# Altium PCB PCB2.PcbDoc
Units mm, origin at the board's own origin, x right, y up, seen from the top; angles counter-clockwise.
Board outline 152.4 x 101.6 mm, 2 copper layers (Top Layer, Bottom Layer); 2 components, 4 nets, 11 pads, 0 vias.
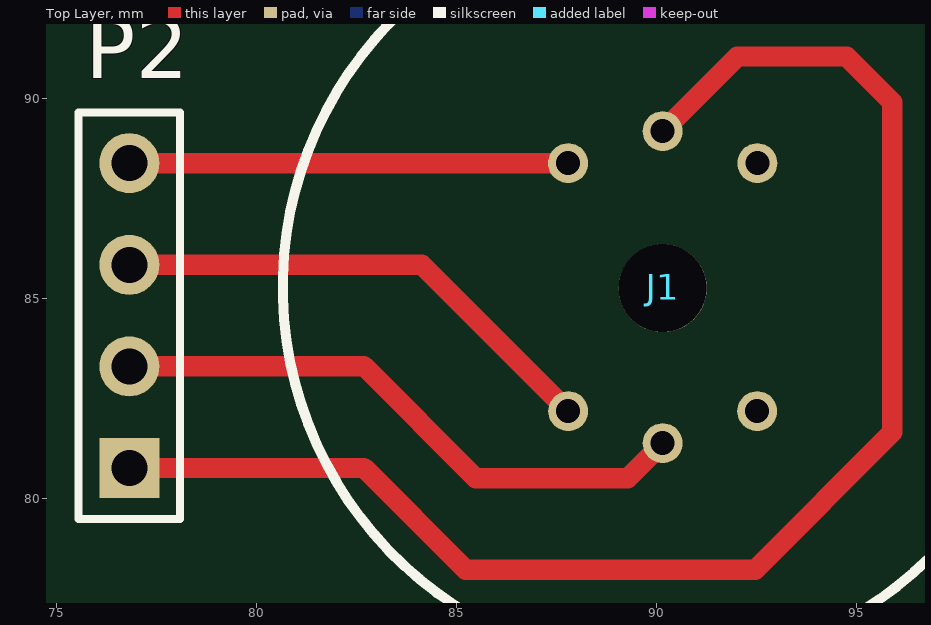
[diagram p0: Top Layer view]
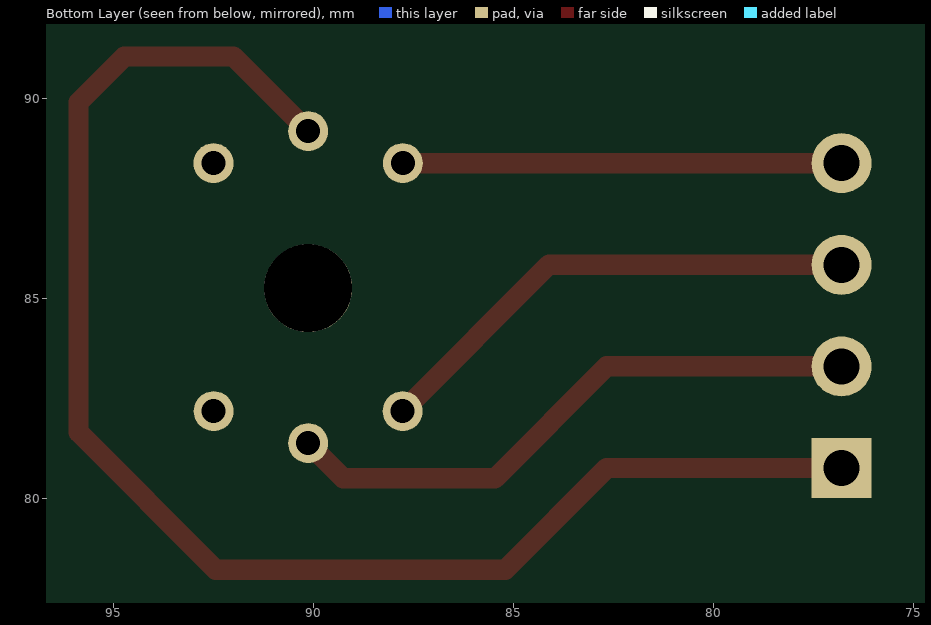
[diagram p1: Bottom Layer view, seen from below]

## Layer stack, top to bottom
Top Layer: signal copper 0.0356
Dielectric: dielectric 0.32, FR-4, Dk 4.8
Bottom Layer: signal copper 0.0356

## Board outline
25.4,25.4 177.8,25.4 177.8,127 25.4,127

## Design rules (kind name [scope] priority, off if disabled: settings)
Clearance [All] p1: gap=0.254
PolygonConnect [All] p1: connectstyle=Relief reliefconductorwidth=0.254 reliefentries=4 polygonreliefangle="90 Angle"
RoutingVias [All] p1: holewidth=0.711 width=1.27 viastyle="Through Hole" minholewidth=0.711 minwidth=1.27 maxholewidth=0.711 maxwidth=1.27
SilkscreenOverComponentPads [All] p1: minsilkscreentomaskgap=0.254
SolderMaskExpansion [All] p1: expansion=0.102
Width [All] p1: maxlimit=5.08 minlimit=0.254 preferedwidth=0.254
27 further rules are at their usual default settings.

## Components (designator, comment, footprint, x,y, rotation, side; value= is the part's Value field where it differs from the comment)
J1 "MPM281" MPM281 90.145,85.293 r0 top
P2 "Header 4" HDR1X4 76.81,80.772 r90 top

## Footprints (in the part's own frame and the unit in brackets; to place one, negate y for a bottom-side part, rotate by r counter-clockwise, add the part's x,y. Pads: shape width x height; smd on the part's side, far side on the other; paste and mask are expansions set on the pad)
HDR1X4 [mm] "Connector; Header; 4 Position"
  rect 1.5x1.5 hole 0.9: 1(0,0)
  round 1.5 hole 0.9: 2(2.54,0) 3(5.08,0) 4(7.62,0)
  silkscreen extent -1.27,-1.27 8.89,1.27
MPM281 [mm]
  round 1 hole 0.6: 3(2.362,-3.1) 4(0,-3.9) 5(-2.362,-3.1) 8(-2.366,3.1) 9(0,3.9) 10(2.366,3.1)
  round 2.2 hole 2.2 unplated: 12(0,-0.025)
  silkscreen extent -9.5,-9.5 9.5,9.5

## Part data
P2: "Header, 4-Pin"

## Nets (pads, with @x,y where several pads share a name; then routed paths per layer and width w, separated by ;. In a path a pad name is that pad's centre, name@x,y a point inside that pad or via, vN(x,y) a via of type N, cw(c..) or ccw(c..) an arc to the next point about the centre after c; other vN are vias at no path point)
GND: J1.5 P2.3 | length 12.5
  Top Layer w0.508: P2.3 84.124,85.852 J1.5
OUT+: J1.4 P2.2 | length 14.9
  Top Layer w0.508: P2.2 82.677,83.312 85.471,80.518 89.269,80.518 J1.4
OUT-: J1.9 P2.1 | length 36.8
  Top Layer w0.508: P2.1 82.677,80.772 85.217,78.232 92.456,78.232 95.885,81.661 95.885,89.916 94.742,91.059 92.01,91.059 J1.9
P1: J1.8 P2.4 | length 11
  Top Layer w0.508: P2.4 J1.8
pads on no net: J1.3 J1.10 J1.12

## Silkscreen, mask and mechanical layers (free items; w line width, h text height)
Mechanical 1:
  circle w0.254: c90.17,85.217 r18